# Altium PCB MCU1.PcbDoc
Units mil, origin at the board's own origin, x right, y up, seen from the top; angles counter-clockwise.
Board outline 3240 x 2100 mil, 2 copper layers (Top Layer, Bottom Layer); 75 components, 56 nets, 266 pads, 44 vias.
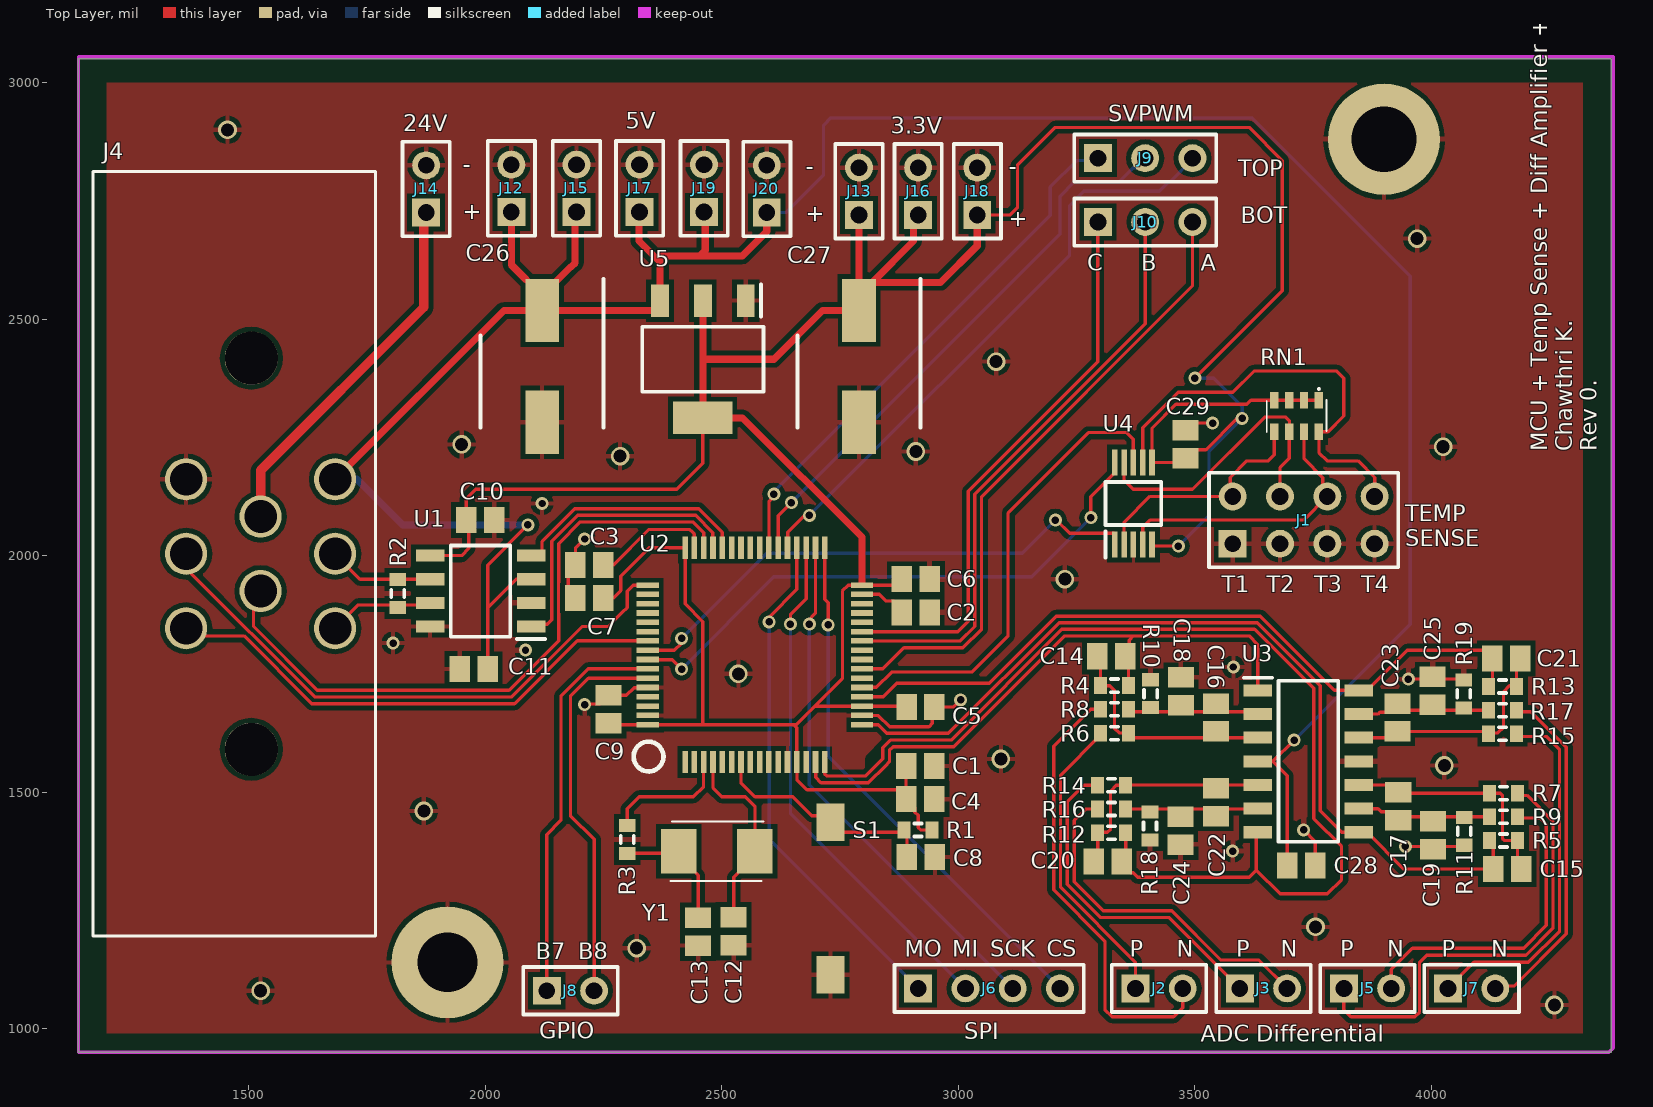
[diagram p0: Top Layer view]
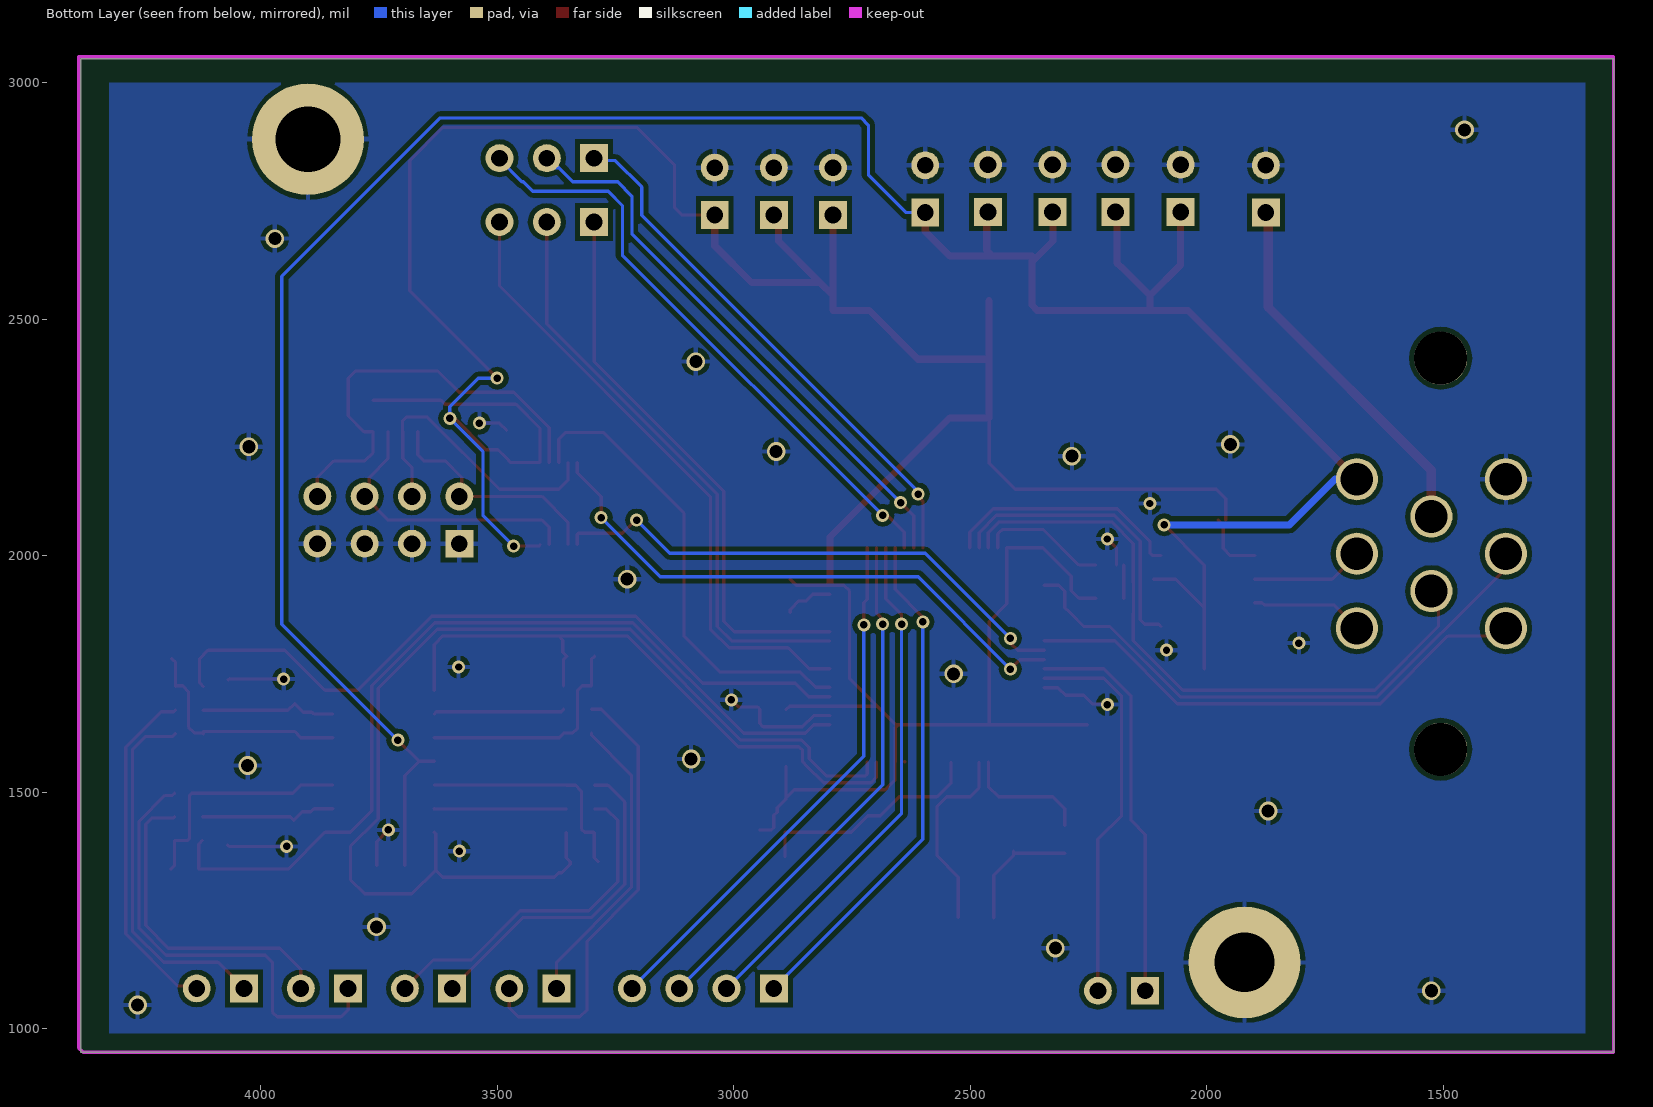
[diagram p1: Bottom Layer view, seen from below]

## Layer stack, top to bottom
Top Solder: solder mask 0.4, Solder Resist, Dk 3.5
Top Layer: signal copper 1.4
Dielectric 1: dielectric 12.6, FR-4, Dk 4.8
Bottom Layer: signal copper 1.4
Bottom Solder: solder mask 0.4, Solder Resist, Dk 3.5

## Board outline
1140,950 4380,950 4380,3050 1140,3050

## Design rules (kind name [scope] priority, off if disabled: settings)
Clearance [All] p1: gap=10 ignorepadtopadclearanceinfootprint=TRUE except(0: Arc-Hole Track-Hole SMDPad-Hole THPad-Hole Via-Hole Fill-Hole Poly-Hole Region-Hole Text-Hole; 7: Arc-Arc Arc-Track Track-Track Text-Text)
PolygonConnect [All] p1: connectstyle=Relief reliefconductorwidth=10 reliefentries=4 polygonreliefangle="90 Angle" airgapwidth=10
RoutingVias [All] p1: holewidth=15.75 width=27.56 viastyle="Through Hole" minholewidth=11.81 minwidth=23.62 maxholewidth=78.74 maxwidth=118.11
SolderMaskExpansion [All] p1: expansion=4 istentingtop=FALSE
Width [All] p1: maxlimit=20 minlimit=7 preferedwidth=10 minimp=50.000000 maximp=50.000000 favimp=50.000000
30 further rules are at their usual default settings.

## Classes and differential pairs
component class MCU: C26 C27 J2 J3 J4 J5 J6 J7 J8 J9 J10 J12 J13 J14 J15 J16 J17 J18 J19 J20 U5
component class Designator: C29 J1 RN1 U4

## Components (designator, comment, footprint, x,y, rotation, side; value= is the part's Value field where it differs from the comment)
C1 "10V" C0805 2919.05,1555 r0 top value=10nF
C2 "10V" C0805 2910,1880 r180 top value=2.2uF
C3 "10V" C0805 2220,1980 r0 top value=2.2uF
C4 "10V" C0805 2919.53,1485 r180 top value=1uF
C5 "10V" C0805 2920,1680 r0 top value=100nF
C6 "10V" C0805 2910,1950 r0 top value=100nF
C7 "10V" C0805 2219.53,1910 r180 top value=100nF
C8 "10V" C0805 2920.92,1362.61 r0 top value=100nF
C9 "10V" C0805 2260,1675 r90 top value=100nF
C10 "10V" C0805 1989.53,2075 r0 top value=100nF
C11 "10V" C0805 1975.47,1760 r180 top value=100nF
C12 "50V" C0805 2525,1205.47 r90 top value=4pF
C13 "50V" C0805 2450,1205 r90 top value=4pF
C14 "10V" C0805 3323.49,1787.13 r0 top value=100pF
C15 "10V" C0805 4160.53,1337.34 r0 top value=100pF
C16 "10V" C0805 3545,1657.68 r270 top value=100pF
C17 "10V" C0805 3930,1470 r90 top value=100pF
C18 "10V" C0805 3470.6,1713.57 r270 top value=100pF
C19 "10V" C0805 4003.05,1408.79 r90 top value=100pF
C20 "10V" C0805 3316.05,1353.18 r0 top value=100pF
C21 "10V" C0805 4158.57,1782.19 r0 top value=100pF
C22 "10V" C0805 3545,1478.47 r90 top value=100pF
C23 "10V" C0805 3928.23,1657.68 r270 top value=100pF
C24 "10V" C0805 3470,1418.47 r90 top value=100pF
C25 "10V" C0805 4002.64,1713.89 r270 top value=100pF
C26 "Cap Pol3" CAPAE660X800N 2120,2400 r270 top value=10uF
C27 "Cap Pol3" CAPAE660X800N 2790,2400 r270 top value=100uF
C28 "10V" C0805 3725,1345 r0 top value=100nF
C29 "10V" C0805 3480,2235 r90 top value=100nF
J1 "Header 4X2A" HDR2X4_CEN 3580,2025 r0 top
J2 "Header 2" HDR1X2 3374.31,1085 r0 top
J3 "Header 2" HDR1X2 3595,1085 r0 top
J4 "1-776279-2" CONN8_776279_TEC 1682.48,2161.22 r90 top
J5 "Header 2" HDR1X2 3815,1085 r0 top
J6 "Header 4" HDR1X4 2915,1085 r0 top
J7 "Header 2" HDR1X2 4035,1085 r0 top
J8 "Header 2" HDR1X2 2130,1080 r0 top
J9 "Header 3" HDR1X3 3295,2840 r0 top
J10 "Header 3" HDR1X3 3295,2705 r0 top
J12 "Header 2" HDR1X2 2055,2726.3 r90 top
J13 "Header 2" HDR1X2 2790,2720 r90 top
J14 "Header 2" HDR1X2 1875,2725 r90 top
J15 "Header 2" HDR1X2 2192.74,2726.3 r90 top
J16 "Header 2" HDR1X2 2915,2720 r90 top
J17 "Header 2" HDR1X2 2326.17,2726.3 r90 top
J18 "Header 2" HDR1X2 3040,2720 r90 top
J19 "Header 2" HDR1X2 2462.45,2726.3 r90 top
J20 "Header 2" HDR1X2 2595,2725 r90 top
R1 "5%" J1-0603 2915,1420 r0 top value=10K
R2 "5%" J1-0603 1815,1920 r90 top value=120
R3 "0603" J1-0603 2300,1400 r270 top value=0
R4 "5%" J1-0603 3330.09,1725.08 r180 top value=4.7K
R5 "5%" J1-0603 4152.46,1397.69 r0 top value=4.7K
R6 "5%" J1-0603 3330,1624.22 r180 top value=7.5K
R7 "5%" J1-0603 4152.46,1497.69 r0 top value=7.5K
R8 "5%" J1-0603 3330,1675 r180 top value=7.5K
R9 "5%" J1-0603 4152.46,1447.69 r0 top value=7.5K
R10 "5%" J1-0603 3406.48,1707.92 r90 top value=4.7K
R11 "5%" J1-0603 4069.53,1417.1 r270 top value=4.7K
R12 "5%" J1-0603 3324.03,1413.79 r180 top value=4.7K
R13 "5%" J1-0603 4150.34,1723.14 r0 top value=4.7K
R14 "5%" J1-0603 3323.79,1514.53 r180 top value=7.5K
R15 "5%" J1-0603 4150.52,1623.16 r0 top value=7.5K
R16 "5%" J1-0603 3323.82,1464.18 r180 top value=7.5K
R17 "5%" J1-0603 4150.52,1673.16 r0 top value=7.5K
R18 "5%" J1-0603 3405,1428.47 r270 top value=4.7K
R19 "5%" J1-0603 4068.23,1707.68 r90 top value=4.7K
RN1 "YC164-FR-0710KL" YC164JR07220RL 3715,2295 r180 top
S1 "SW-PB" "PTS636 SM43 SMTR LFS" 2730,1275 r270 top
U1 "TJA1051T_3,118" SOIC127P600X175-8N 1990,1925 r180 top
U2 "STM32F405RGT6TR" STM32F405RGT6TR 2570,1790 r0 top
U3 "LM324AMX_NOPB" "SOIC127P600X175-14N - duplicate" 3740,1565 r0 top
U4 "TMUX1204DGSR" SOP50P490X110-10N 3370,2110 r90 top
U5 "TLV1117-33IDCYR" SOT230P700X180-4N 2460,2415 r270 top
Y1 "CX5032GB08000H0HPQZ1" CX5032GB08000H0HPQZ1 2489.29,1375 r0 top

## Footprints (in the part's own frame and the unit in brackets; to place one, negate y for a bottom-side part, rotate by r counter-clockwise, add the part's x,y. Pads: shape width x height; smd on the part's side, far side on the other; paste and mask are expansions set on the pad)
C0805 [mm] "Chip Capacitor, Body 2.0x1.3mm, IPC High Density"
  rect 1.1x1.4 smd: 1(-0.75,0) 2(0.75,0)
  body extent -1.1,-0.72 1.1,0.72, height 1.4
CAPAE660X800N [mm]
  rect 3.4x1.8 smd: 1(-3,0) 2(3,0)
  silkscreen extent -4.7,-3.3 3.3,3.3, body extent -3.9,-3.4 3.9,3.4, height 8
CONN8_776279_TEC [mil]
  round 89 hole 69 mask+0: 1(0,0) 2(-157.48,0) 3(-314.96,0) 4(-78.74,157.48) 5(-236.22,157.48) 6(0,314.96) 7(-157.48,314.96) 8(-314.96,314.96)
  round 112 hole 112: 9(-570.87,177.17) 10(255.91,177.17)
  silkscreen extent -965,-85 651,512, body extent 0,0 10,10, height 10
CX5032GB08000H0HPQZ1 [mm]
  rect 1.9x2.4 smd: 1(-2.05,0) 2(2.05,0)
  silkscreen extent -2.5,-1.6 2.5,1.6, body extent 0,0 0,0
HDR1X2 [mm] "Connector; Header; 2 Position"
  rect 1.5x1.5 hole 0.9: 1(0,0)
  round 1.5 hole 0.9: 2(2.54,0)
  silkscreen extent -1.27,-1.27 3.81,1.27
HDR1X3 [mm] "Connector; Header; 3 Position"
  rect 1.5x1.5 hole 0.9: 1(0,0)
  round 1.5 hole 0.9: 2(2.54,0) 3(5.08,0)
  silkscreen extent -1.27,-1.27 6.35,1.27
HDR1X4 [mm] "Connector; Header; 4 Position"
  rect 1.5x1.5 hole 0.9: 1(0,0)
  round 1.5 hole 0.9: 2(2.54,0) 3(5.08,0) 4(7.62,0)
  silkscreen extent -1.27,-1.27 8.89,1.27
HDR2X4_CEN [mm] "Connector; Header; 4x2 Position"
  rect 1.5x1.5 hole 0.9: 1(0,0)
  round 1.5 hole 0.9: 2(2.54,0) 3(5.08,0) 4(7.62,0) 5(0,2.54) 6(2.54,2.54) 7(5.08,2.54) 8(7.62,2.54)
  silkscreen extent -1.27,-1.27 8.89,3.81
J1-0603 [mm] "Chip Resistor, Body 1.6x0.8mm, IPC High Density"
  rect 0.7x0.9 smd: 1(-0.75,0) 2(0.75,0)
  silkscreen extent -0.2,-0.35 0.2,0.35, body extent -0.85,-0.48 0.85,0.48, height 0.9
"PTS636 SM43 SMTR LFS" [mm]
  rect 2x1.5 smd: 1(-4.1,0) 2(4.1,0)
  body extent -3,-1.75 3,2.85, height 4.3
SOIC127P600X175-8N [mm]
  rect 1.525x0.65 smd: 1(-2.712,1.905) 2(-2.712,0.635) 3(-2.712,-0.635) 4(-2.712,-1.905) 5(2.712,-1.905) 6(2.712,-0.635) 7(2.712,0.635) 8(2.712,1.905)
  silkscreen extent -3.47,-2.45 1.6,2.58, body extent -3,-2.45 3,2.45, height 1.75
"SOIC127P600X175-14N - duplicate" [mm]
  rect 1.525x0.65 smd: 1(-2.712,3.81) 2(-2.712,2.54) 3(-2.712,1.27) 4(-2.712,0) 5(-2.712,-1.27) 6(-2.712,-2.54) 7(-2.712,-3.81) 8(2.712,-3.81) 9(2.712,-2.54) 10(2.712,-1.27) 11(2.712,0) 12(2.712,1.27) 13(2.712,2.54) 14(2.712,3.81)
  silkscreen extent -3.47,-4.33 1.6,4.48, body extent -3,-4.33 3,4.33, height 1.75
SOP50P490X110-10N [mm]
  rect 1.4x0.3 smd: 1(-2.2,1) 2(-2.2,0.5) 3(-2.2,0) 4(-2.2,-0.5) 5(-2.2,-1) 6(2.2,-1) 7(2.2,-0.5) 8(2.2,0) 9(2.2,0.5) 10(2.2,1)
  silkscreen extent -2.9,-1.5 1.15,1.5, body extent -2.45,-1.5 2.45,1.5, height 1.1
SOT230P700X180-4N [mm]
  rect 1.75x0.95 smd: 1(-3.15,2.3) 2(-3.15,0) 3(-3.15,-2.3)
  rect 1.75x3.2 smd: 4(3.15,0)
  silkscreen extent -4.03,-3.25 1.75,3.25, body extent -3.5,-3.25 3.5,3.25, height 1.8
STM32F405RGT6TR [mm]
  rect 0.3x1.2 smd: 1(-3.75,-5.75) 2(-3.25,-5.75) 3(-2.75,-5.75) 4(-2.25,-5.75) 5(-1.75,-5.75) 6(-1.25,-5.75) 7(-0.75,-5.75) 8(-0.25,-5.75) 9(0.25,-5.75) 10(0.75,-5.75) 11(1.25,-5.75) 12(1.75,-5.75) 13(2.25,-5.75) 14(2.75,-5.75) 15(3.25,-5.75) 16(3.75,-5.75) 33(3.75,5.75) 34(3.25,5.75) 35(2.75,5.75) 36(2.25,5.75) 37(1.75,5.75) 38(1.25,5.75) 39(0.75,5.75) 40(0.25,5.75) 41(-0.25,5.75) 42(-0.75,5.75) 43(-1.25,5.75) 44(-1.75,5.75) 45(-2.25,5.75) 46(-2.75,5.75) 47(-3.25,5.75) 48(-3.75,5.75)
  rect 1.2x0.3 smd: 17(5.75,-3.75) 18(5.75,-3.25) 19(5.75,-2.75) 20(5.75,-2.25) 21(5.75,-1.75) 22(5.75,-1.25) 23(5.75,-0.75) 24(5.75,-0.25) 25(5.75,0.25) 26(5.75,0.75) 27(5.75,1.25) 28(5.75,1.75) 29(5.75,2.25) 30(5.75,2.75) 31(5.75,3.25) 32(5.75,3.75) 49(-5.75,3.75) 50(-5.75,3.25) 51(-5.75,2.75) 52(-5.75,2.25) 53(-5.75,1.75) 54(-5.75,1.25) 55(-5.75,0.75) 56(-5.75,0.25) 57(-5.75,-0.25) 58(-5.75,-0.75) 59(-5.75,-1.25) 60(-5.75,-1.75) 61(-5.75,-2.25) 62(-5.75,-2.75) 63(-5.75,-3.25) 64(-5.75,-3.75)
  silkscreen extent -6.51,-6.26 -4.91,-4.66, body extent -4.83,-4.89 4.83,4.89, height 1.6
YC164JR07220RL [mm]
  rect 0.45x0.9 smd: 1(-1.2,-0.85) 2(-0.4,-0.85) 3(0.4,-0.85) 4(1.2,-0.85) 5(1.2,0.85) 6(0.4,0.85) 7(-0.4,0.85) 8(-1.2,0.85)
  silkscreen extent -1.6,-1.5 1.6,0.85

## Part data
C1: library part Cap, "C0805C103K8RAC7800. 10000pF ±10% 10V Ceramic Capacitor X7R 0805 (2012 Metric)", LatestRevisionDate=17-Jul-2002, LatestRevisionNote="Re-released for DXP Platform.", PackageDescription="Radial Cap, Thru-Hole; 2 Leads; 0.3 in Pin Spacing", PackageReference=RAD-0.3, Published=8-Jun-2000, Publisher="Altium Limited"
C2 C3: library part Cap, "C0805C225K8RACAUTO. 2.2µF ±10% 10V Ceramic Capacitor X7R 0805 (2012 Metric)", LatestRevisionDate=17-Jul-2002, LatestRevisionNote="Re-released for DXP Platform.", PackageDescription="Radial Cap, Thru-Hole; 2 Leads; 0.3 in Pin Spacing", PackageReference=RAD-0.3, Published=8-Jun-2000, Publisher="Altium Limited"
C4: library part Cap, "CL21B105KPFNNNE. 1µF ±10% 10V Ceramic Capacitor X7R 0805 (2012 Metric)", LatestRevisionDate=17-Jul-2002, LatestRevisionNote="Re-released for DXP Platform.", PackageDescription="Radial Cap, Thru-Hole; 2 Leads; 0.3 in Pin Spacing", PackageReference=RAD-0.3, Published=8-Jun-2000, Publisher="Altium Limited"
C5 C6 C7 C8 C9 C10 C11 C14 C15 C16 C17 C18 C19 C20 C21 C22 C23 C24 C25 C28 C29: library part Cap, "C0805C104K8RACTU. 0.1µF ±10% 10V Ceramic Capacitor X7R 0805 (2012 Metric)", LatestRevisionDate=17-Jul-2002, LatestRevisionNote="Re-released for DXP Platform.", PackageDescription="Radial Cap, Thru-Hole; 2 Leads; 0.3 in Pin Spacing", PackageReference=RAD-0.3, Published=8-Jun-2000, Publisher="Altium Limited"
C12: library part Cap, "CBR08C409B5GAC. 4pF ±0.1pF 50V Ceramic Capacitor C0G, NP0 0805 (2012 Metric)", LatestRevisionDate=17-Jul-2002, LatestRevisionNote="Re-released for DXP Platform.", PackageDescription="Radial Cap, Thru-Hole; 2 Leads; 0.3 in Pin Spacing", PackageReference=RAD-0.3, Published=8-Jun-2000, Publisher="Altium Limited"
C13: library part Cap, "CBR08C409B5GAC", LatestRevisionDate=17-Jul-2002, LatestRevisionNote="Re-released for DXP Platform.", PackageDescription="Radial Cap, Thru-Hole; 2 Leads; 0.3 in Pin Spacing", PackageReference=RAD-0.3, Published=8-Jun-2000, Publisher="Altium Limited"
C26 C27: "Polarized Capacitor (Surface Mount)", LatestRevisionDate=29-May-2009, LatestRevisionNote="IPC-7351 Footprint Added.", PackageDescription="Chip Capacitor", PackageReference=C0805, Published=8-Jun-2000, Publisher="Altium Limited"
J1: "Header, 4-Pin, Dual row", LatestRevisionDate=17-Jul-2002, LatestRevisionNote="Re-released for DXP Platform.", Publisher="Altium Limited"
J2 J3 J5 J7 J8 J12 J13 J14 J15 J16 J17 J18 J19 J20: "Header, 2-Pin", LatestRevisionDate=17-Jul-2002, LatestRevisionNote="Re-released for DXP Platform.", Publisher="Altium Limited"
J4: "8 POS RIGHT ANGLE HEADER ASSY", Built_By=EMA_UL_Team, Copyright="Copyright (C) 2016 Accelerated Designs. All rights reserved", Manufacturer_Part_Number=1-776279-2, PITCH(MM)=0.157, POSITIONS=8, PRODUCT=-, RefDes=RefDes, ROWS/CONFIG=3, SourceLibrary=TE_Connectivity-2018-03-16, TE_Part_Number=1-776279-2, Type=DEV, Vendor="TE Connectivity"
J6: "Header, 4-Pin", LatestRevisionDate=17-Jul-2002, LatestRevisionNote="Re-released for DXP Platform.", Publisher="Altium Limited"
J9 J10: "Header, 3-Pin", LatestRevisionDate=17-Jul-2002, LatestRevisionNote="Re-released for DXP Platform.", Publisher="Altium Limited"
R1 R2 R4 R5 R6 R7 R8 R9 R10 R11 R12 R13 R14 R15 R16 R17 R18 R19: library part Res1, "ERJ-3GEYJ103V. 10 kOhms ±5% 0.1W, 1/10W Chip Resistor 0603 (1608 Metric) Automotive AEC-Q200 Thick Film", LatestRevisionDate=17-Jul-2002, LatestRevisionNote="Re-released for DXP Platform.", PackageDescription="Axial Device, Thru-Hole; 2 Leads; 0.3 in Pin Spacing", PackageReference=AXIAL-0.3, Published=8-Jun-2000, Publisher="Altium Limited"
R3: library part Res1, "ERJ-U030R00V. 0 Ohms Jumper 0.1W, 1/10W Chip Resistor 0603 (1608 Metric) Anti-Sulfur, Automotive AEC-Q200 Thick Film", LatestRevisionDate=17-Jul-2002, LatestRevisionNote="Re-released for DXP Platform.", PackageDescription="Axial Device, Thru-Hole; 2 Leads; 0.3 in Pin Spacing", PackageReference=AXIAL-0.3, Published=8-Jun-2000, Publisher="Altium Limited"
RN1: "Resistor Network", Manufacturer_Name="YAGEO (PHYCOMP)", Mouser Part Number=603-YC164-FR-0710KL, Arrow Part Number=YC164-FR-0710KL, Datasheet Link=https://www.mouser.com/datasheet/2/447/PYu-YC_TC_group_51_RoHS_L_7-1313905.pdf, Height=0mm, Manufacturer_Part_Number=YC164-FR-0710KL, Mouser Price/Stock=https://www.mouser.co.uk/ProductDetail/Yageo/YC164-FR-0710KL?qs=8cPjvKtxWv4rLfyjGsoQQw%3D%3D
S1: "Switch", LatestRevisionDate=17-Jul-2002, LatestRevisionNote="Re-released for DXP Platform.", PackageDescription="Switch; 2 Leads", PackageReference=SPST-2, Published=24-Mar-1999, Publisher="Altium Limited"
U1: "Integrated Circuit", Arrow Part Number=TJA1051T/3,118, Manufacturer_Name=NXP, Mouser Part Number=771-TJA1051T3118, Arrow Price/Stock=https://www.arrow.com/en/products/tja1051t3118/nxp-semiconductors, Datasheet Link=http://www.nxp.com/docs/en/data-sheet/TJA1051.pdf, Height=1.75mm, Manufacturer_Part_Number=TJA1051T/3,118, Mouser Price/Stock=https://www.mouser.co.uk/ProductDetail/NXP-Semiconductors/TJA1051T-3118?qs=O%2F7ihdSJpebv1PFlp05wnQ%3D%3D
U3: "Integrated Circuit", Arrow Part Number=LM324AMX/NOPB, Manufacturer_Name="Texas Instruments", Mouser Part Number=926-LM324AMX/NOPB, Arrow Price/Stock=https://www.arrow.com/en/products/lm324amxnopb/texas-instruments, Datasheet Link=http://www.ti.com/lit/ds/symlink/lm124-n.pdf, Height=1.75mm, Manufacturer_Part_Number=LM324AMX/NOPB, Mouser Price/Stock=https://www.mouser.co.uk/ProductDetail/Texas-Instruments/LM324AMX-NOPB?qs=X1J7HmVL2ZGoShKBIiyAoQ%3D%3D
U4: "Integrated Circuit", Manufacturer_Name="Texas Instruments", Mouser Part Number=595-TMUX1204DGSR, Arrow Part Number=TMUX1204DGSR, Arrow Price/Stock=https://www.arrow.com/en/products/tmux1204dgsr/texas-instruments, Datasheet Link=http://www.ti.com/lit/gpn/TMUX1204, Height=1.1mm, Manufacturer_Part_Number=TMUX1204DGSR, Mouser Price/Stock=https://www.mouser.co.uk/ProductDetail/Texas-Instruments/TMUX1204DGSR?qs=EBDBlbfErPw42Q0DdvAwUg%3D%3D
U5: "Integrated Circuit", Manufacturer_Name="Texas Instruments", Mouser Part Number=595-TLV1117-33IDCYR, Arrow Part Number=TLV1117-33IDCYR, Arrow Price/Stock=https://www.arrow.com/en/products/tlv1117-33idcyr/texas-instruments, Datasheet Link=http://www.ti.com/lit/ds/symlink/tlv1117.pdf?HQS=TI-null-null-digikeymode-df-pf-null-wwe&ts=1590668900314, Height=1.8mm, Manufacturer_Part_Number=TLV1117-33IDCYR, Mouser Price/Stock=https://www.mouser.co.uk/ProductDetail/Texas-Instruments/TLV1117-33IDCYR?qs=p6lVfQR1GSoKgp3tAXcW5w%3D%3D
Y1: library part XTAL, "8MHz ±20ppm Crystal 12pF 300 Ohms 2-SMD, No Lead", LatestRevisionDate=17-Jul-2002, LatestRevisionNote="Re-released for DXP Platform.", PackageDescription="Crystal, Thru-Hole; 2 Leads; Body 3.1 x 8.2 mm (Dia.xH)", PackageReference=R38, Published=8-Jun-2000, Publisher="Altium Limited"

## Free pads (board coordinates)
  round 236.22 hole 137.8: 1(3900,2880)
  round 236.22 hole 125.98: 2(1920,1140)

## Via types
v1: diameter 27.56, hole 15.75, Top Layer to Bottom Layer, 28 vias
v2: diameter 39.37, hole 27.56, Top Layer to Bottom Layer, 16 vias

## Nets (pads, with @x,y where several pads share a name; then routed paths per layer and width w, separated by ;. In a path a pad name is that pad's centre, name@x,y a point inside that pad or via, vN(x,y) a via of type N, cw(c..) or ccw(c..) an arc to the next point about the centre after c; other vN are vias at no path point)
3V3: C1.1 C4.2 C5.1 C6.1 C7.1 C9.1 C10.1 C27.1 C29.1 J13.1 J16.1 J18.1 R1.2 RN1.1 RN1.2 RN1.3 RN1.4 U1.5 U2.13 U2.19 U2.32 U2.48 U2.64 U4.5 U4.6 U5.2 U5.4 | length 7497.7
  Top Layer w7: U1.5@1898.23,2000 1950,2000 1965,2015 1965,2064.53 C10.1@1975.47,2075 ; C10.1 1960,2120 1980,2140 2405,2140 2460,2195 U5.4 ; C7.1@2234.53,1910 2270,1910 2286,1926 2286,1956 2346.38,2016.38 U2.48 2422.36,1897.64 2460,1860 2460,1642.36 ; C9.1@2252.64,1642.36 U2.64 2460,1642.36 ; U2.32@2796.38,1941.36 U2.32 ; C6.1 2867.83,1937.36 2796.66,1937.36 U2.32 ; C1.1 C4.2@2889.53,1487.32 ; C5.1@2889.53,1674.08 2881.87,1681.73 U2.19 2696.73,1681.73 ; R1.2 2920,1420 2915,1425 2915,1450.75 2908.15,1457.6 2908.15,1466.85 C4.2 2890,1486.85 C4.2@2889.53,1487.32 ; J18.1 3110,2720 3125,2735 3125,2825 3205,2905 3615,2905 3685,2835 3685,2560 v1(3500,2375) ; U4.5 3409.37,2022.41 3411.78,2020 v1(3465,2020) ; v1(3600,2290) 3590,2290 3523.63,2223.63 3498.15,2223.63 C29.1 3471.14,2196.61 U4.6 3409.37,2269.37 3460,2320 3610,2320 3618.46,2328.46 RN1.4 RN1.3 RN1.2 RN1.1 ; 2460,1642.36 2652.4,1642.36 ; 2652.4,1642.36 2657.36,1642.36 2696.73,1681.73 ; 2652.4,1642.36 2658.58,1636.18 U2.13 2658.86,1563.34 2658.86,1526.14 2680,1505 2871.85,1505 C4.2@2889.53,1487.32 ; 2696.73,1681.73 2755,1740 2755,1925.19 2767.16,1937.36 2796.1,1937.36 U2.32
  Top Layer w15: U5.2 2460,2415 ; J13.1 C27.1@2790,2549.61 ; U2.32@2796.38,1941.36 2796.1,1941.64 2796.1,2038.9 2544.02,2290.98 U5.4 2460,2415 ; J16.1 2905,2710 2905,2664.61 C27.1@2817.93,2577.54 ; J18.1 3040,2655 2962.54,2577.54 C27.1@2817.93,2577.54 ; 2460,2415 2610,2415 2713.11,2518.11 C27.1 C27.1@2790,2549.61 ; C27.1@2790,2549.61 C27.1@2817.93,2577.54
  Bottom Layer w7: v1@3470,2025 3530,2085 3530,2220 v1(3600,2290) 3600,2315 3540.17,2374.83 3500.17,2374.83 v1(3500,2375)
+5: C11.1 C26.1 C28.1 J4.1 J12.1 J15.1 J17.1 J19.1 J20.1 U1.3 U3.4 U5.3 | length 5868.2
  Top Layer w7: C11.1 2005,1890 ; v1(2090,2065) 2005,1980 2005,1890 ; U1.3@2111.77,1950 2065,1950 2005,1890 ; U3.4 3665,1565 ; C28.1 3695.47,1534.53 3665,1565 ; v1(3710,1610) 3665,1565
  Top Layer w15: J4.1 2039.37,2518.11 C26.1 ; J12.1 2055,2614.61 C26.1@2120,2549.61 ; J15.1 2190,2723.57 2190,2618.79 2181.21,2610 2180.39,2610 C26.1@2120,2549.61 ; J17.1 2325,2725.13 2325,2665 2369.45,2620.55 ; J19.1 2465,2723.75 2465,2645 2453.3,2633.3 ; J20.1 2595,2685 2543.3,2633.3 2453.3,2633.3 ; C26.1 C26.1@2120,2549.61 ; C26.1 2358.25,2518.11 2369.45,2529.31 U5.3 2369.45,2620.55 ; 2369.45,2620.55 2369.45,2633.3 2453.3,2633.3
  Bottom Layer w7: J20.1 2635,2725 2715,2805 2715,2910 2730,2925 3620,2925 3955,2590 3955,1855 v1(3710,1610)
  Bottom Layer w15: J4.1 1728.78,2161.22 1825,2065 v1(2090,2065)
+24: J4.4 J14.1 | length 787.5
  Top Layer w15: J14.1@1870,2720 J14.1
  Top Layer w20: J4.4 1525,2180 1870,2525 J14.1@1870,2720
CAN_RX: U1.4 U2.44 | length 512.5
  Top Layer w7: U1.4 2114,2000 2120,2006 2120,2029.8 2189.2,2099 2199,2099 2451,2099 2501.1,2048.9 U2.44
CAN_TX: U1.1 U2.45 | length 626.3
  Top Layer w7: U1.1 2101.77,1855 2130.9,1855 2140.29,1864.39 2140.29,2030.29 2195,2085 2430,2085 2444.8,2085 2481.14,2048.66 2481.14,2016.66 U2.45
GND: C1.2 C2.1 C3.1 C4.1 C5.2 C6.2 C7.2 C8.2 C9.2 C10.2 C11.2 C12.1 C13.1 C18.1 C19.1 C24.1 C25.1 C26.2 C27.2 C28.2 C29.2 J1.1 J1.2 J1.3 J1.4 J4.6 J12.2 J13.2 J14.2 J15.2 J16.2 J17.2 J18.2 J19.2 J20.2 pad.1 pad.2 R10.2 R11.2 R18.2 R19.2 S1.2 U1.2 U1.8 U2.12 U2.18 U2.60 U2.63 U3.11 U4.3 U5.1 | length 941
  Top Layer w7: C7.2@2175.47,1910 C3.1@2175.47,1980 ; C3.1 2190.47,2015.47 v1(2210,2035) ; v1@2213.93,1681.07 v1(2210,1685) 2211.37,1686.37 2241.85,1686.37 C9.2 2298.06,1704.53 2314.35,1720.82 2343.34,1720.82 U2.60 ; U2.12@2638.62,1563.9 U2.12 ; U2.18 2796.66,1661.77 2830.94,1661.77 2854.65,1638.06 2938.06,1638.06 2945,1645 2945,1675.47 C5.2 2990,1680 v1(3005,1695) ; C29.2 3495.59,2280.12 v1(3537.5,2280.12) ; v1(3730,1420) 3754.53,1395.47 C28.2 ; v1(3945,1385) 4066.96,1385 R11.2 ; v1(3951.16,1738.87) 4064.31,1738.87 4065.44,1740 R19.2
  other v1: 3580,1375 3581.42,1764.37 2085,1800 1805,1815 2120,2110
  other v2: 4260,1050 1525,1080 2320,1170 3755,1215 1870,1460 4027.28,1556.26 3090,1570 2535,1750 3225,1950 2285,2210 2910,2220 4025,2230 1950,2235 3080,2410 3970,2670 1455,2900
NetC2_2: C2.2 U2.31 | length 103.3
  Top Layer w7: U2.31 2832.46,1917.95 2846.36,1904.06 2862.32,1904.06 2880.47,1885.91 C2.2
NetC3_2: C3.2 U2.47 | length 271.5
  Top Layer w7: C3.2@2234.53,1980 2270,1980 2345,2055 2432.36,2055 2436.16,2051.2 2441.77,2045.59 2441.77,2016.66 U2.47
NetC8_1: C8.1 R1.1 S1.1 U2.7 | length 489.3
  Top Layer w7: U2.7 2540.47,1519.53 2570,1490 2650,1490 2690,1450 2716.42,1450 2751.42,1415 R1.1@2890,1415 ; C8.1 R1.1@2891.39,1415
NetC12_2: C12.2 U2.4 Y1.2 | length 413.2
  Top Layer w7: U2.4 2481.42,1508.58 2500,1490 2550,1490 2570,1470 Y1.2 2570,1365.16 2525,1320.16 C12.2
NetC13_2: C13.2 R3.2 Y1.1 | length 268.1
  Top Layer w7: R3.2 2404.05,1370.47 Y1.1 2408.58,1365.16 2450,1323.74 C13.2
NetC14_2: C14.2 R4.1 U2.15 U3.1 | length 1333.5
  Top Layer w7: U2.15 2698.23,1563.34 2698.23,1531.3 2709.54,1520 2810,1520 2846.14,1556.14 2854.37,1564.37 2854.37,1588.15 2854.43,1588.2 2862.28,1596.06 2990.66,1596.06 3224.6,1830 3370,1830 ; R4.1 3359.62,1780.53 C14.2 3361.09,1795.2 3361.09,1821.09 3370,1830 ; U3.1 3633.23,1811.77 3615,1830 3370,1830
NetC15_1: C15.1 R5.1 U2.17 U3.8 | length 1873.7
  Top Layer w7: U2.17 2830.54,1642.36 2848.85,1624.06 2979.06,1624.06 3213,1858 3632,1858 3765,1725 3765,1460 3810,1415 U3.8 3864,1415 3941.65,1337.34 C15.1 4131,1389.62 R5.1
NetC20_2: C20.2 R12.1 U2.16 U3.7 | length 2349.9
  Top Layer w7: U2.16 2717.36,1563.34 2717.36,1538.1 2721.46,1534 2804.2,1534 2816,1545.8 2840.37,1570.17 2840.37,1593.95 2840.43,1594 2856.48,1610.06 2984.86,1610.06 3218.8,1844 3626.2,1844 3751,1719.2 3751,1444 3810,1385 3810,1315 3780,1285 3680,1285 3630,1335 ; R12.1 3353.56,1361.16 C20.2 3345.57,1347.27 3363.73,1329.12 3369.63,1329.12 3378.75,1320 3615,1320 3630,1335 ; U3.7 3630,1411.77 3630,1335
NetC21_1: C21.1 R13.1 U2.20 U3.14 | length 1573.4
  Top Layer w7: U2.20 2841.42,1701.42 2870,1730 3065.2,1730 3207.2,1872 3638,1872 3795,1715 U3.14 3864,1715 3949,1800 4111.23,1800 C21.1 4129.04,1731.37 R13.1
NetJ2_1: J2.1 R6.2 | length 639.8
  Top Layer w7: R6.2 3300.47,1620.28 3216,1535.81 3216,1299 3374.31,1140.69 J2.1
NetJ2_2: J2.2 R8.2 | length 951.7
  Top Layer w7: R8.2 3280,1675 3202,1597 3202,1293 3310,1185 3310,1040 3325,1025 3455,1025 3474.31,1044.31 J2.2
NetJ3_1: J3.1 R14.2 | length 709.1
  Top Layer w7: R14.2 3265.47,1514.53 3230,1479.05 3230,1305 3300,1235 3445,1235 J3.1
NetJ3_2: J3.2 R16.2 | length 732.5
  Top Layer w7: R16.2 3269.18,1464.18 3245,1440 3245,1310 3306,1249 3450.8,1249 3554.8,1145 3635,1145 J3.2
NetJ4_2: J4.2 R2.2 U1.6 | length 238.4
  Top Layer w7: J4.2 J4.2@1693.7,1992.52 ; J4.2@1693.09,1991.91 1735,1950 1819.53,1950 U1.6 U1.6@1898.23,1950
NetJ4_3: J4.3 R2.1 U1.7 | length 238
  Top Layer w7: J4.3 1731.69,1895.47 1815,1895.47 1878.7,1895.47 U1.7 U1.7@1898.23,1900
NetJ4_5: J4.5 U2.46 | length 1398
  Top Layer w7: J4.5 1510,1910 1510,1850 1645,1715 2050.2,1715 2155,1819.8 2155,1876.7 2154.85,1876.85 2154.85,1943.15 2155,1943.3 2155,2025 2201,2071 2439,2071 2461.73,2048.27 U2.46
NetJ4_7: J4.7 U2.49 | length 1238.3
  Top Layer w7: J4.7 1367.52,1972.48 1639,1701 2056,1701 2205,1850 2260,1850 2290,1880 2300,1890 2300,1925 2312.36,1937.36 2343.34,1937.36 U2.49
NetJ4_8: J4.8 U2.55 | length 1097.4
  Top Layer w7: J4.8 1383.78,1830 1490,1830 1633,1687 1633.2,1687 2061.8,1687 2194.8,1820 2314.22,1820 2314.41,1819.81 2343.34,1819.81 U2.55
NetJ5_1: J5.1 R7.2 | length 957.9
  Top Layer w7: J5.1 3815,1040 3830,1025 3965,1025 3975,1035 3975,1140 3990,1155 4200,1155 4257,1212 4257,1438 4202.17,1492.83 4186.85,1492.83 R7.2
NetJ5_2: J5.2 R9.2 | length 688
  Top Layer w7: J5.2 3915,1125 3960,1170 4195,1170 4243,1218 4243,1432 4230,1445 4184.68,1445 R9.2
NetJ6_1: J6.1 U2.36 | length 1086.1
  Top Layer w7: v1(2600,1860) 2600,1870 2658.58,1928.58 U2.36
  Bottom Layer w7: v1(2600,1860) 2600,1400 J6.1
NetJ6_2: J6.2 U2.35 | length 1098.4
  Top Layer w7: v1(2645,1855) 2645,1875 2678.27,1908.27 U2.35
  Bottom Layer w7: v1(2645,1855) 2645,1455 J6.2
NetJ6_3: J6.3 U2.34 | length 1118
  Top Layer w7: v1(2685,1855) 2685,1857.5 2681.25,1861.25 2697.95,1877.95 U2.34
  Bottom Layer w7: v1(2685,1855) 2685,1515 J6.3
NetJ6_4: J6.4 U2.33 | length 1137.4
  Top Layer w7: U2.33 2717.64,1907.36 2724.71,1900.29 v1(2724.71,1853.36)
  Bottom Layer w7: v1(2724.71,1853.36) 2724.71,1575.29 J6.4
NetJ7_1: J7.1 R15.2 | length 774.5
  Top Layer w7: J7.1 4090,1140 4205.2,1140 4271,1205.8 4271,1589.2 4242.6,1617.6 4185.61,1617.6 R15.2
NetJ7_2: J7.2 R17.2 | length 730
  Top Layer w7: J7.2 4140.03,1090.03 4175.03,1090.03 4285,1200 4285,1595 4210,1670 4183.21,1670 R17.2
NetJ8_1: J8.1 U2.58 | length 842.8
  Top Layer w7: J8.1 2130,1410 2160,1440 2160,1702.9 2217.57,1760.47 U2.58
NetJ8_2: J8.2 U2.59 | length 822.9
  Top Layer w7: J8.2 2230,1400 2180,1450 2180,1702.83 2217.96,1740.79 U2.59
NetJ9_1: J9.1 U2.39 | length 1136.6
  Top Layer w7: U2.39 2599.81,2016.66 2599.81,2114.81 2610,2125 v1(2610,2130) ; J9.1@3272.92,2833.94 J9.1@3273.97,2835
  Bottom Layer w7: v1(2610,2130) 2610,2135 3194.23,2719.23 3194.23,2779.23 3250,2835 3290,2835 J9.1
NetJ9_2: J9.2 U2.38 | length 1198.2
  Top Layer w7: U2.38@2619.49,2016.66 2619.49,2084.49 v1(2647.04,2112.04)
  Bottom Layer w7: v1(2647.04,2112.04) 3215,2680 3215,2760 3245,2790 3340,2790 3370,2820 J9.2@3398.38,2820
NetJ9_3: J9.3 U2.37 | length 1278.9
  Top Layer w7: U2.37@2639.18,2016.66 2639.18,2049.18 2675,2085 v1(2685,2085)
  Bottom Layer w7: v1(2685,2085) 3235,2635 3235,2740 3265,2770 3425,2770 3445,2790 3447.5,2790 3495,2837.5 J9.3
NetJ10_1: J10.1 U2.27 | length 1191.4
  Top Layer w7: U2.27 2852.96,1839.21 2853.23,1838.94 2998.94,1838.94 3021,1861 3021,2135.6 3295,2409.6 J10.1
NetJ10_2: J10.2 U2.26 | length 1260.4
  Top Layer w7: U2.26 3004.53,1819.53 3035,1850 3035,2129.8 3395,2489.8 J10.2@3395,2710
NetJ10_3: J10.3 U2.23 | length 1344.6
  Top Layer w7: U2.23 2840.47,1760.47 2885,1805 3009.8,1805 3049,1844.2 3049,2124 3495,2570 J10.3@3495,2716.74
NetR3_1: R3.1 U2.3 | length 268.5
  Top Layer w7: R3.1 2300,1465 2325,1490 2440,1490 2461.45,1511.45 2461.45,1563.34 U2.3
NetU2_21: U2.21 U4.8 | length 1004.3
  Top Layer w7: U2.21 2796.66,1721.38 2826.38,1721.38 2858.76,1753.76 3028.76,1753.76 3105,1830 3105,2090 3275,2260 3355.9,2260 3369.72,2246.18 3369.72,2196.89 U4.8
NetU2_56: U2.56 U4.1 | length 1134.5
  Top Layer w7: U2.56 2399.84,1799.84 2415,1815 v1@2415,1821.09 ; v1@3207.5,2075 3235.06,2047.44 3328.22,2047.44 3330.63,2045.04 U4.1
  Bottom Layer w7: v1(2415,1825) 2595,2005 3135,2005 v1(3205,2075)
NetU2_57: U2.57 U4.10 | length 1214.9
  Top Layer w7: U2.57 2343.9,1779.88 2395,1779.88 2414.88,1760 v1(2415,1760) ; v1(3280,2080) 3280,2124.33 3330.63,2174.96 U4.10
  Bottom Layer w7: v1(2415,1760) 2609.92,1954.92 3154.92,1954.92 v1(3280,2080)
OP_1_N: C16.1 C18.2 R8.1 R10.1 U3.2 | length 277.8
  Top Layer w7: R8.1 3364.53,1670 3628.23,1670 U3.2
OP_1_P: C14.1 C16.2 R4.2 R6.1 U3.3 | length 489.9
  Top Layer w7: C14.1 3300.56,1780.53 R4.2 3300.64,1725 3320,1725 3330,1715 3330,1635 3340,1625 3358.74,1625 R6.1 3368.74,1615 U3.3
OP_2_N: C22.1 C24.2 R16.1 R18.1 U3.6 | length 280.2
  Top Layer w7: R16.1 3632.41,1464.18 U3.6
OP_2_P: C20.1 C22.2 R12.2 R14.1 U3.5 | length 491.7
  Top Layer w7: C20.1 3294.5,1361.16 R12.2 3295.72,1415 3315,1415 3321.78,1421.78 3321.78,1502.21 3334.1,1514.53 R14.1 3353.79,1515 U3.5
OP_3_N: C17.1 C19.2 R9.1 R11.1 U3.9 | length 289.3
  Top Layer w7: U3.9 3887.29,1465 3893.67,1458.63 3911.85,1458.63 C17.1 3937.21,1447.69 R9.1
OP_3_P: C15.2 C17.2 R5.2 R7.1 U3.10 | length 501.2
  Top Layer w7: U3.10 3914.53,1515 C17.2 3931.84,1497.69 4145.98,1497.69 4150.22,1493.45 4150.22,1401.79 4154.32,1397.69 R5.2 4181.99,1345.4 C15.2
OP_4_N: C23.1 C25.2 R17.1 R19.1 U3.13 | length 289.2
  Top Layer w7: U3.13 3887.29,1665 3891.35,1669.06 3910.08,1669.06 C23.1 3942.29,1673.16 R17.1
OP_4_P: C21.2 C23.2 R13.2 R15.1 U3.12 | length 487.9
  Top Layer w7: U3.12 3915.08,1615 C23.2 R15.1@4120.99,1628.15 ; R15.1 4122.84,1625 4140,1625 4152.5,1637.5 4152.5,1712.5 4165,1725 4178,1725 R13.2 4179.87,1773.95 C21.2
TEMP_1: J1.5 RN1.5 U4.2 | length 502.7
  Top Layer w7: U4.2 3350.32,2070.32 3405,2125 J1.5 3575,2130 3575,2165 3610,2200 3655,2200 3667.76,2212.76 RN1.5
TEMP_2: J1.6 RN1.6 U4.9 | length 629.8
  Top Layer w7: U4.9 3350.04,2196.33 3350.04,2159.96 3370,2140 3495,2140 3647.75,2292.75 3692.25,2292.75 3700,2285 3700,2262.28 RN1.6 3699.25,2205.51 3680,2186.26 J1.6
TEMP_3: J1.7 RN1.7 U4.4 | length 610.6
  Top Layer w7: U4.4 3389.68,2059.68 3405,2075 3730,2075 J1.7 3770.04,2134.96 3770.04,2164.96 3730.75,2204.25 RN1.7
TEMP_4: J1.8 RN1.8 U4.7 | length 924.4
  Top Layer w7: U4.7 3389.96,2196.89 3389.96,2269.96 3465,2345 3580,2345 3625,2390 3800,2390 3815,2375 3815,2295 3781.54,2261.54 RN1.8 3762.24,2217.76 3780,2200 3845,2200 3880,2165 J1.8
pads on no net: J4.9 J4.10 U2.1 U2.2 U2.5 U2.6 U2.8 U2.9 U2.10 U2.11 U2.14 U2.22 U2.24 U2.25 U2.28 U2.29 U2.30 U2.40 U2.41 U2.42 U2.43 U2.50 U2.51 U2.52 U2.53 U2.54 U2.61 U2.62

## Polygon pours and split planes (outlines as drawn)
GND on Bottom Layer "GND_L02_P000" (solid, pour order 0): 1200,3000 1200,990 4320,990 4320,1020 4320,3000
GND on Top Layer "GND_L01_P001" (solid, remove dead copper, pour order 1): 1200,3000 1200,990 4320,990 4320,1020 4320,3000

## Keep-outs
Keep-Out Layer:
  lines w7: 1140,950 4375,950 4385,960 4385,3055 1140,3055 1140,950

## Silkscreen, mask and mechanical layers (free items; w line width, h text height)
Top Overlay:
  text "SVPWM" at 3317,2917 h35
  text "5V" at 2297,2902 h35
  text "24V" at 1827,2897 h35
  text "3.3V" at 2857,2892 h35
  text "-" at 1952,2809.51 h35
  text "-" at 2677,2804.51 h35
  text "-" at 3107,2804.51 h35
  text "TOP" at 3592,2802 h35
  text "+" at 1952,2711.17 h35
  text "+" at 2677,2706.17 h35
  text "BOT" at 3597,2702 h35
  text "+" at 3107,2696.17 h35
  text "C" at 3272,2602 h35
  text "B" at 3387,2602 h35
  text "A" at 3512,2602 h35
  text "MCU + Temp Sense + Diff Amplifier + Power Distribution / Chawthri K. / Rev 0." at 4350,2220 h35 r90
  text "TEMP / SENSE" at 3945,2020 h35
  text "T1" at 3557,1922 h35
  text "T2" at 3652,1922 h35
  text "T3" at 3752,1922 h35
  text "T4" at 3852,1922 h35
  text "MO" at 2887,1152 h35
  text "MI" at 2987,1152 h35
  text "SCK" at 3067,1152 h35
  text "CS" at 3187,1152 h35
  text "P" at 3362,1152 h35
  text "N" at 3462,1152 h35
  text "P" at 3587,1152 h35
  text "N" at 3682,1152 h35
  text "P" at 3807,1152 h35
  text "N" at 3907,1152 h35
  text "P" at 4022,1152 h35
  text "N" at 4127,1152 h35
  text "B7" at 2107,1147 h35
  text "B8" at 2197,1147 h35
  text "GPIO" at 2114.36,978.88 h35
  text "SPI" at 3012,977 h35
  text "ADC Differential" at 3512,972 h35